# Altium PCB TimerSwitch.PcbDoc
Units mil, origin at the board's own origin, x right, y up, seen from the top; angles counter-clockwise.
Board outline 2992.13 x 2992.13 mil, 2 copper layers (Top Layer, Bottom Layer), stack 76.378 mil thick; 33 components, 43 nets, 166 pads, 53 vias.
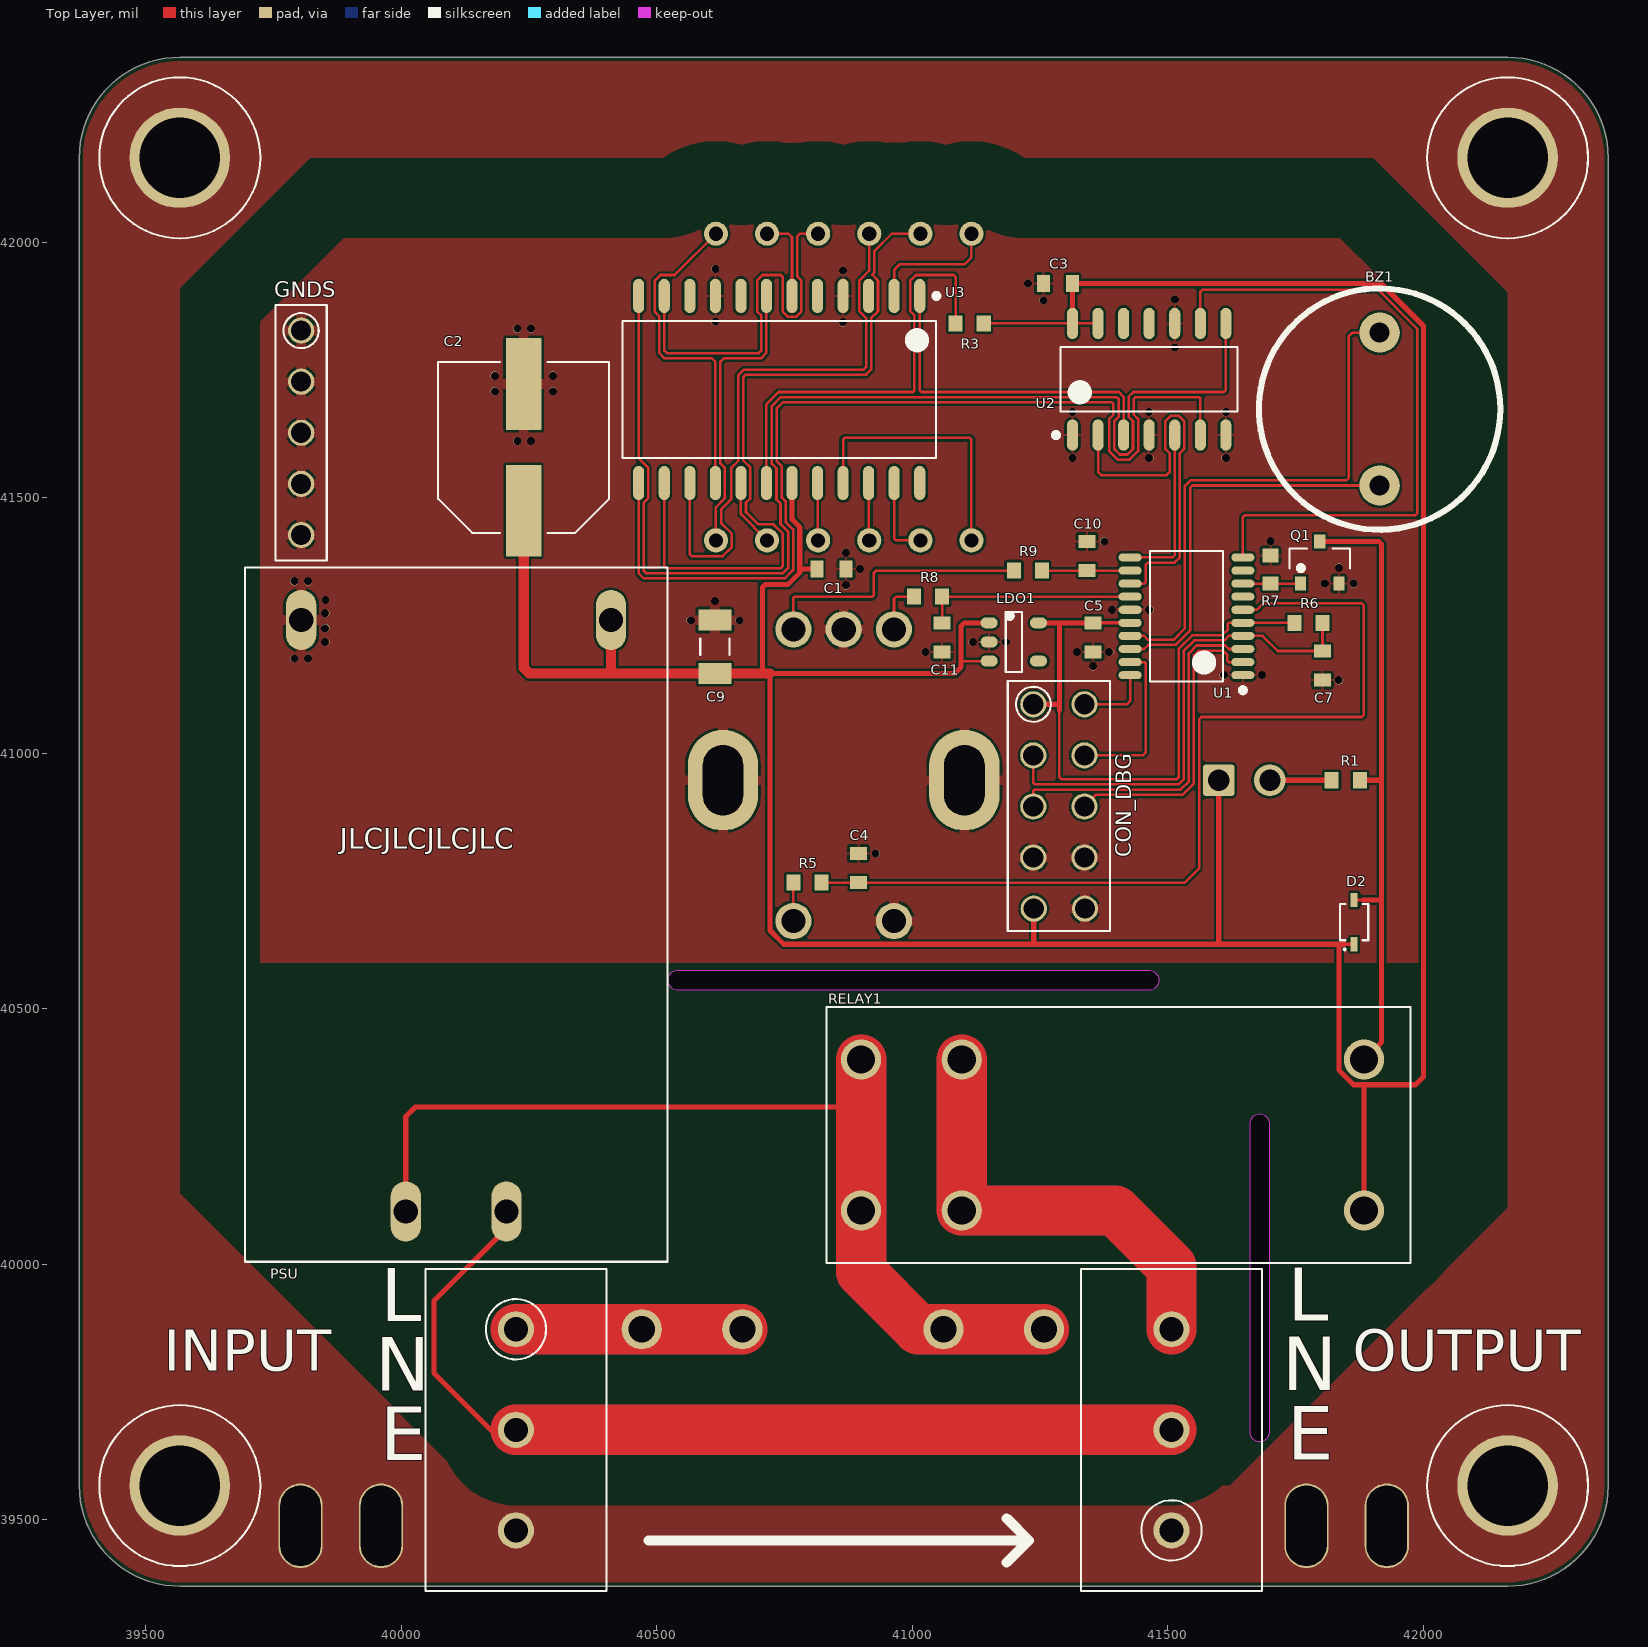
[diagram p0: Top Layer view]
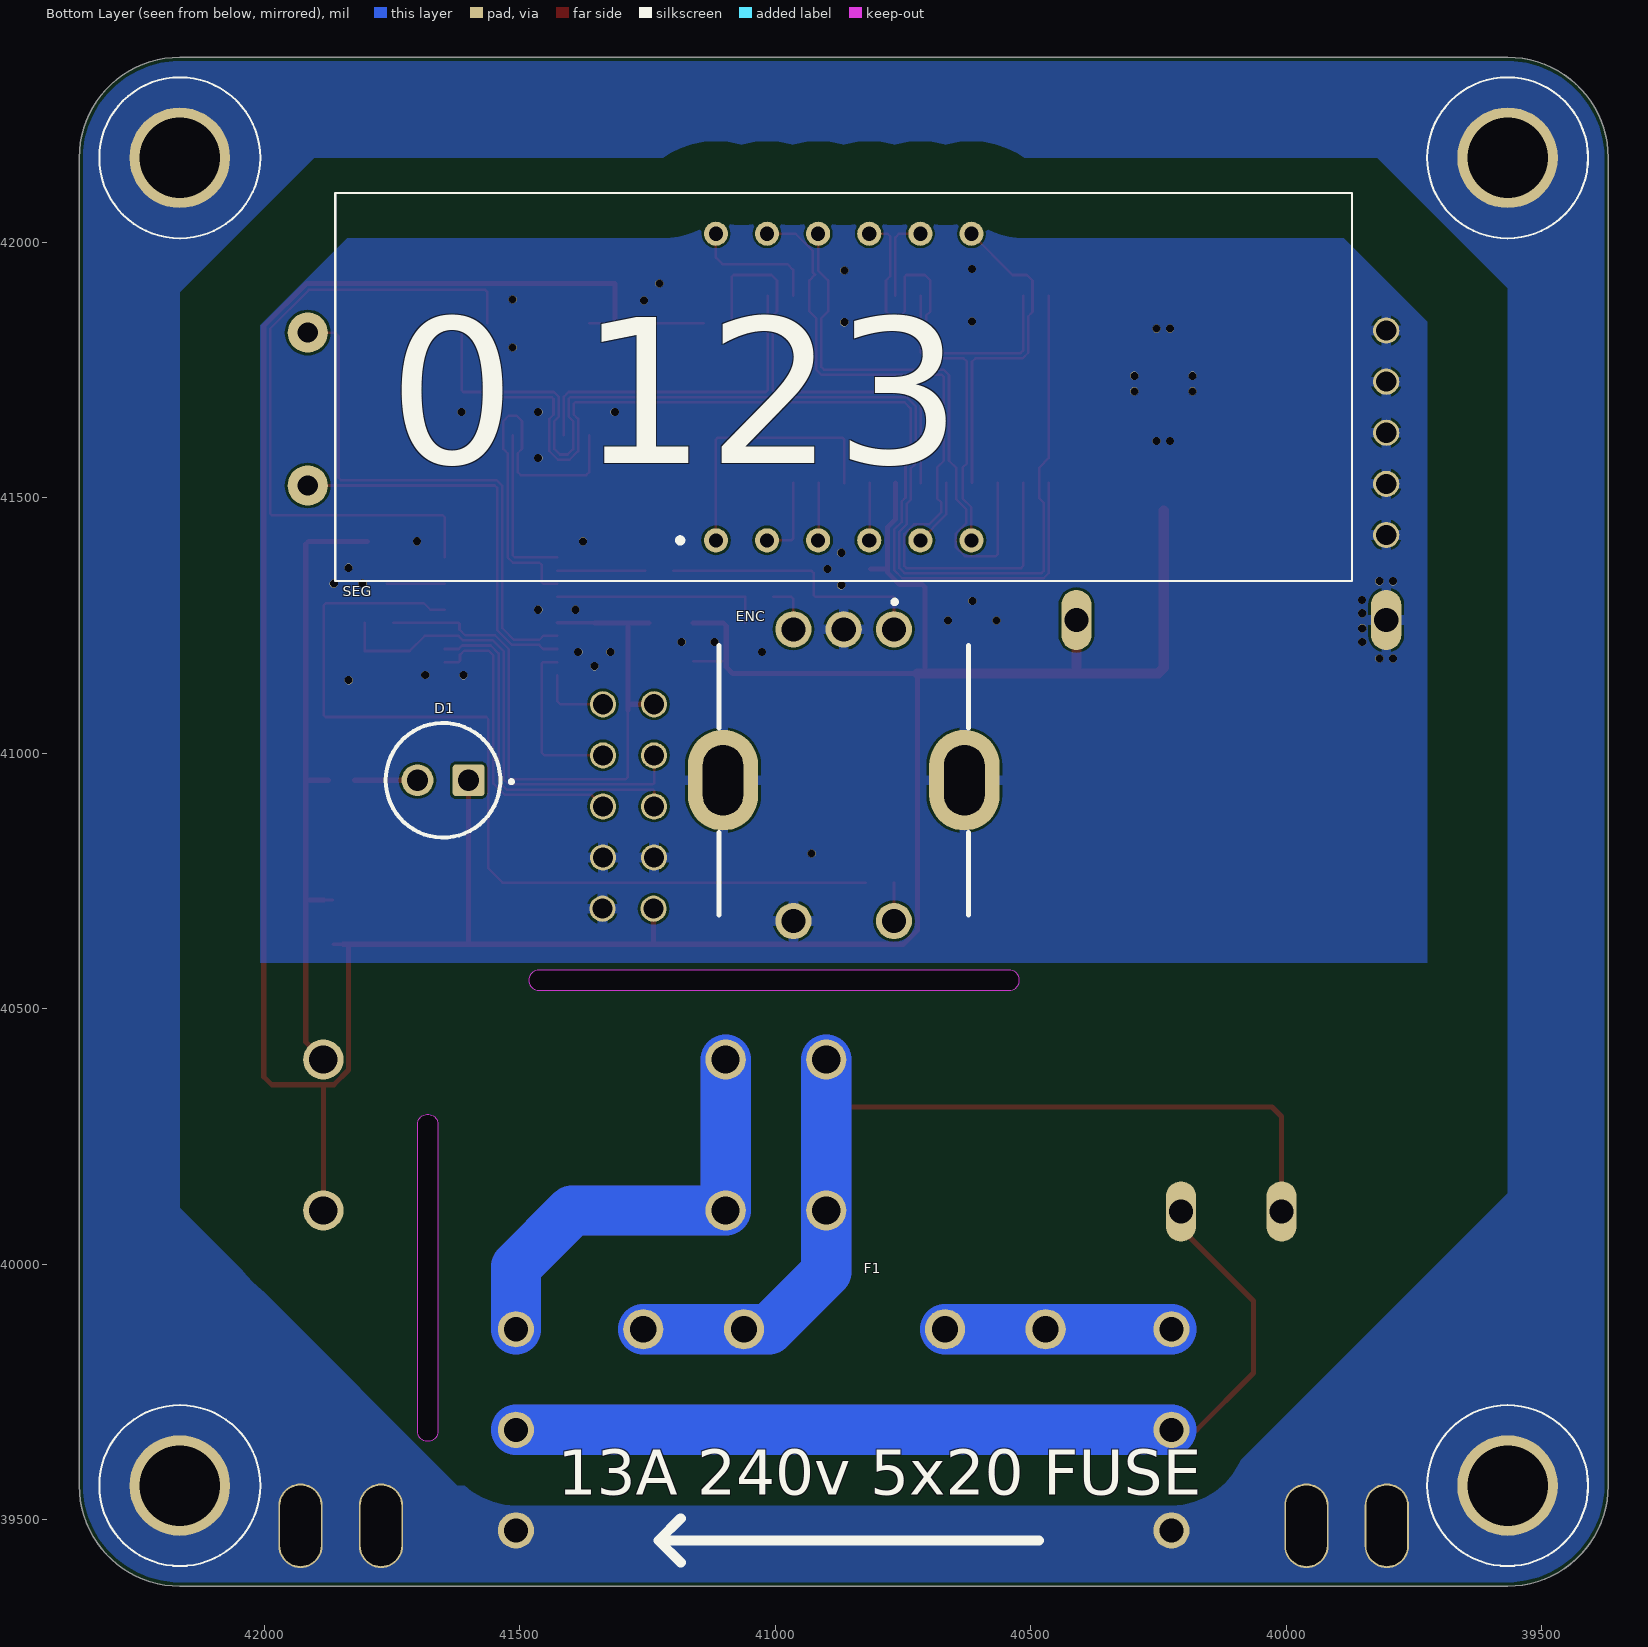
[diagram p1: Bottom Layer view, seen from below]

## Layer stack, top to bottom
Top Solder: solder mask 0.3937, Solder Resist, Dk 3.5
Top Layer: signal copper 2.7559
Dielectric 1: dielectric 70.8661, FR-4, Dk 4.8
Bottom Layer: signal copper 2.7559
Bottom Solder: solder mask 0.3937, Solder Resist, Dk 3.5

## Board outline
39370.08,39566.93 39370.08,42165.35 cw(c39566.93,42165.35) 39566.93,42362.2 42165.35,42362.2 cw(c42165.35,42165.35) 42362.2,42165.35 42362.2,39566.93 cw(c42165.35,39566.93) 42165.35,39370.08 39566.93,39370.08 cw(c39566.93,39566.93)
cut-out: 41660.33,39673.05 ccw(c41680.03,39673.05) 41699.73,39673.05 41699.73,40274 ccw(c41680.03,40274) 41660.33,40274
cut-out: 40542,40536.3 cw(c40542,40556) 40542,40575.7 41463,40575.7 cw(c41463,40556) 41482.7,40556 cw(c41463,40556) 41463,40536.3
cut-out: 40542,40536.3 cw(c40542,40556) 40542,40575.7 41463,40575.7 cw(c41463,40556) 41482.7,40556 cw(c41463,40556) 41463,40536.3

## Design rules (kind name [scope] priority, off if disabled: settings)
BoardOutlineClearance BoardOutlineClearance_ALL [Not InLayerClass('Overlays')] p1: gap=7.87 except(0: Arc-CutoutEdge Track-CutoutEdge SMDPad-CutoutEdge THPad-CutoutEdge Via-CutoutEdge Fill-CutoutEdge Poly-CutoutEdge Region-CutoutEdge Text-CutoutEdge)
Clearance Clearance_GND_MAINS [InNet('GND') vs InNetClass('MAINS')] p1: gap=78.74
Clearance Clearance_MAINS_EARTH [InNetClass('EARTH') Or InNetClass('MAINS') vs Not (InNetClass('EARTH') Or InNetClass('MAINS') Or IsBoardCutoutRegion)] p2: gap=157.48
Clearance Clearance_MAINS_MAINS [InNetClass('MAINS') vs InNetClass('MAINS')] p3: gap=98.42
Clearance Clearance_MAINS_EARTH2 [InNetClass('MAINS') vs InNetClass('EARTH')] p4: gap=98.43
Clearance [All] p5: gap=5
HoleSize [All] p1: absolutevalues=TRUE maxlimit=157.48 minlimit=11.81 maxpercent=80.000 minpercent=20.000
HoleToHoleClearance [All] p1: gap=7.87 allowstackedmicrovias=FALSE
MinimumAnnularRing MinimumAnnularRing_GND [InNet('GND')] p1: minimumring=0
MinimumAnnularRing [All] p2: minimumring=3
MinimumSolderMaskSliver [All] p1: minsoldermaskwidth=1.8
PolygonConnect PolygonConnect_MAINS [All vs InNetClass('EARTH')] p1: connectstyle=Direct reliefconductorwidth=10 reliefentries=4 polygonreliefangle="90 Angle" airgapwidth=10
PolygonConnect PolygonConnect_BIGGER [All vs PadViaLibraryTemplate='MOUNT_HOLE'] p2: connectstyle=Direct reliefconductorwidth=10 reliefentries=4 polygonreliefangle="90 Angle" airgapwidth=10
PolygonConnect PolygonConnect_THRUHOLE [InNet('GND') vs IsPad and ((AsMM(PadXSize_AllLayers)>=1) and (AsMM(PadYSize_AllLayers)>=1))] p3: connectstyle=Relief reliefconductorwidth=20 reliefentries=4 polygonreliefangle="90 Angle" airgapwidth=5
PolygonConnect PolygonConnect_STITCH [All vs PadViaLibraryTemplate='GND_STITCH'] p4: connectstyle=Direct reliefconductorwidth=10 reliefentries=4 polygonreliefangle="90 Angle" airgapwidth=10
PolygonConnect [All] p5: connectstyle=Relief reliefconductorwidth=5 reliefentries=4 polygonreliefangle="90 Angle" airgapwidth=5
RoutingVias RoutingVias_GND [InNet('GND')] p1: holewidth=28 width=50 viastyle="Through Hole" minholewidth=28 minwidth=50 maxholewidth=28 maxwidth=50 useviatemplates=TRUE viatemplateguid#1={2038F321-9B4C-4A12-BEFA-671C173DC19C} viatemplatename#1=GND_STITCH
RoutingVias [All] p2: holewidth=28 width=50 viastyle="Through Hole" minholewidth=28 minwidth=50 maxholewidth=28 maxwidth=50 useviatemplates=TRUE viatemplateguid#1={706E1524-345E-481C-947A-4B07CDBEF7FE} viatemplatename#1=ROUTER
SMDEntry [All] p1: side=TRUE corner=FALSE anyangle=FALSE
SMDNeckDown [All] p1: percent=50.000
SMDToCorner [All] p1: distance=50000
SilkToSilkClearance [All] p1: silktosilkclearance=0
SilkToSolderMaskClearance [IsPad] p1: minsilkscreentomaskgap=0 clearancetoexposedcopper=TRUE
SolderMaskExpansion [All] p1: expansion=4
Width [All] p1: maxlimit=100 minlimit=5 preferedwidth=5 minimp=50.000000 maximp=50.000000 favimp=50.000000
25 further rules are at their usual default settings.

## Classes and differential pairs
net class MAINS: LINE LINE_HOT LINE_IN NEUTRAL
net class EARTH: EARTH

## Components (designator, comment, footprint, x,y, rotation, side; value= is the part's Value field where it differs from the comment)
BZ1 "BUZZER" PIEZO_BUZZER 41915,41673.66 r270 top
C1 "100nF" CAPC1608X07L 40842.14,41360.64 r180 top
C2 "100uF" CAPAE9585X105L 40239.83,41598.67 r90 top
C3 "100nF" CAPC1608X07L 41285.46,41919.33 r0 top
C4 "100nF" CAPC1608X07L 40894.86,40775.54 r270 top
C5 "1uF" CAPC1608X07L 41354,41226.74 r270 top
C7 "1uF" CAPC1608X07L 41803.15,41171.62 r90 top
C9 "4.7uF" CAPC3216X07L 40614,41208.45 r90 top
C10 "100nF" CAPC1608X07L 41342,41386.19 r90 top
C11 "100nF" CAPC1608X07L 41058.76,41226.73 r90 top
CON_DBG "CON10" CON10 41287.19,40895.89 r270 top
D1 "LED" LED 41650.19,40947.28 r90 bottom
D2 "DSF05S30U" SODFL250X100-2L 41865.16,40669.57 r90 top
ENC "ROTARY_ENCODER" PEC12R-4XXXF-SXXXX_1 40866.13,40947.28 r0 bottom
F1 "520_102701" "5x20 FUSE" 40864.63,39872.85 r180 bottom
GNDS "CON5" CON5 39804.45,41627.25 r270 top
INPUT "TERMINAL" TERMINAL_BLOCK 40224.63,39676 r270 top
LDO1 "NCV8560SN350T1G" TSOP95P280X110-6L 41199,41217.88 r0 top
OUTPUT "TERMINAL" TERMINAL_BLOCK 41507.63,39676 r90 top
PSU "HLK-PM01" HLK-PM01 40107.6,40103.4 r90 top
Q1 "SSM3K36MFV" SOT95P230X110-3L 41797.83,41373.39 r90 top
R1 "1.2k" RESC1608X05L 41848.75,40947.28 r180 top
R3 "28k" RESC1608X05L 41112.67,41841.25 r0 top
R5 "2K" RESC1608X05L 40795.27,40747 r180 top
R6 "10k" RESC1608X05L 41775.59,41255.28 r180 top
R7 "10k" RESC1608X05L 41701.21,41359.61 r270 top
R8 "2K" RESC1608X05L 41031.2,41306.46 r0 top
R9 "2K" RESC1608X05L 41226.77,41357.64 r0 top
RELAY1 "HF118F" G5RL-1-E-HR 41884.53,40400.62 r180 top
SEG "5641AH" 5641AH 40866.14,41716.74 r180 bottom
U1 "STM32F030F4P6" TSOP65P630X120-20L 41537,41268.08 r180 top
U2 "74HC125" SOIC127P600X175-14L 41464,41732 r90 top
U3 "MAX7219" SOIC127P1030X265-24L 40740,41712 r270 top

## Footprints (in the part's own frame and the unit in brackets; to place one, negate y for a bottom-side part, rotate by r counter-clockwise, add the part's x,y. Pads: shape width x height; smd on the part's side, far side on the other; paste and mask are expansions set on the pad)
"5x20 FUSE" [mm] "5x20 FUSE, 5A, 240v, speed F"
  round 2 hole 1.3: 1(5,0) 1(10,0) 2(-10,0) 2(-5,0)
  body extent -10.3,-3.87 10.3,3.87, height 11.42
5641AH [mm]
  round 1.2 hole 0.7: 1(-6.35,-7.62) 2(-3.81,-7.62) 3(-1.27,-7.62) 4(1.27,-7.62) 5(3.81,-7.62) 6(6.35,-7.62) 7(6.35,7.62) 8(3.81,7.62) 9(1.27,7.62) 10(-1.27,7.62) 11(-3.81,7.62) 12(-6.35,7.62)
  silkscreen extent -25.27,-9.65 25.27,9.65, body extent -25.15,-9.5 25.15,9.5, height 8.05
CAPAE9585X105L [mm] "Aluminum Electrolytic Capacitor, Body 8.50x8.45x10.50mm, IPC High Density"
  rrect1% 4.55x1.75 smd: 1(-3.15,0) 2(3.15,0)
  silkscreen extent -4.25,-4.25 4.25,4.25, body extent -4.75,-4.25 4.75,4.25, height 10.5
CAPC1608X07L [mm] "Chip Capacitor, 2-Leads, Body 1.60x0.80mm, IPC High Density"
  rrect1% 0.65x0.85 smd: 1(-0.725,0) 2(0.725,0)
  body extent -0.85,-0.45 0.85,0.45, height 0.7
CAPC3216X07L [mm] "Chip Capacitor, 2-Leads, Body 3.20x1.60mm, IPC High Density"
  rrect1% 1.05x1.65 smd: 1(-1.325,0) 2(1.325,0)
  silkscreen extent -0.4,-0.72 0.4,0.72, body extent -1.65,-0.85 1.65,0.85, height 0.7
CON5 [mm] "2.54 3x2"
  round 1.3 hole 1: 1(-5.08,0) 2(-2.54,0) 3(0,0) 4(2.54,0) 5(5.08,0)
  silkscreen extent -6.35,-1.27 6.35,1.27
CON10 [mm] "2.54 3x2"
  round 1.3 hole 1: 1(-5.08,-1.27) 2(-2.54,-1.27) 3(0,-1.27) 4(2.54,-1.27) 5(5.08,-1.245) 6(5.08,1.295) 7(2.54,1.27) 8(0,1.27) 9(-2.54,1.27) 10(-5.08,1.27)
  silkscreen extent -6.25,-2.54 6.2,2.54
G5RL-1-E-HR [mm] "16A 240v relay 5v coil 62.5ohm"
  round 2 hole 1.4: 1(0,0) 2(0,7.5) 3(20,0) 3(20,7.5) 4(25,0) 4(25,7.5)
  silkscreen extent -2.31,-2.62 26.72,10.11, body extent -2.3,-2.6 26.7,10.1, height 15.7
HLK-PM01 [mm] "5V PSU"
  oval 3x1.5 hole 1.2: 1(0,2.5) 2(0,-2.5) 3(29.4,7.7) 4(29.4,-7.7)
  silkscreen extent -2.5,-10.5 32,10.5, body extent -2.3,-10.1 31.7,10.1, height 15
LED [mm] "5MM through hole LED"
  rrect20% 1.58x1.58 hole 1.05: 1(0,-1.27)
  round 1.58 hole 1.05: 2(0,1.27)
  silkscreen extent -2.85,-3.47 2.85,2.85, body extent -3,-2.5 3,3, height 8.9
PEC12R-4XXXF-SXXXX_1 [mm]
  round 1.8 hole 1.2: 1(-2.5,-7.5) 2(0,-7.5) 3(2.5,-7.5) 4(-2.5,7) 5(2.5,7)
  rrect100% 3.5x5 hole 2 slot 3.5 at 90 deg: 2(-6,0)
  oval 3.5x5 hole 2 slot 3.5 at 90 deg: 2(6,0)
  silkscreen extent -6.2,-8.95 6.2,6.7, body extent -6.92,-7.67 6.92,7.18, height 26.5
PIEZO_BUZZER [mm] "Piezo buzzer"
  round 2 hole 1: 1(3.8,0) 2(-3.8,0)
  silkscreen extent -6,-6 6,6, body extent -6,-6 6,6, height 9.5
RESC1608X05L [mm] "Chip Resistor, 2-Leads, Body 1.60x0.80mm, IPC High Density"
  rrect1% 0.7x0.8 smd: 1(-0.7,0) 2(0.7,0)
  body extent -0.85,-0.45 0.85,0.45, height 0.5
SODFL250X100-2L [mm] "SODFL, 2-Leads, Body 1.25x2.50mm, IPC High Density"
  rrect1% 0.7x0.35 smd: 1(1.1,0) 2(-1.1,0)
  silkscreen extent -1.4,-0.7 0.9,0.7, body extent -1.25,-0.67 1.25,0.67, height 1
SOIC127P600X175-14L [mm] "SOIC, 14-Leads, Body 8.65x3.90mm, Pitch 1.27mm, IPC High Density"
  oval 1.55x0.55 smd: 1(-2.775,3.81) 2(-2.775,2.54) 3(-2.775,1.27) 4(-2.775,0) 5(-2.775,-1.27) 6(-2.775,-2.54) 7(-2.775,-3.81) 8(2.775,-3.81) 9(2.775,-2.54) 10(2.775,-1.27) 11(2.775,0) 12(2.775,1.27) 13(2.775,2.54) 14(2.775,3.81)
  silkscreen extent -2.9,-4.4 1.6,4.76, body extent -3,-4.4 3,4.4, height 1.75
SOIC127P1030X265-24L [mm] "SOIC, 24-Leads, Body 15.40x7.50mm, Pitch 1.27mm, IPC High Density"
  oval 1.7x0.55 smd: 1(-4.65,6.985) 2(-4.65,5.715) 3(-4.65,4.445) 4(-4.65,3.175) 5(-4.65,1.905) 6(-4.65,0.635) 7(-4.65,-0.635) 8(-4.65,-1.905) 9(-4.65,-3.175) 10(-4.65,-4.445) 11(-4.65,-5.715) 12(-4.65,-6.985) 13(4.65,-6.985) 14(4.65,-5.715) 15(4.65,-4.445) 16(4.65,-3.175) 17(4.65,-1.905) 18(4.65,-0.635) 19(4.65,0.635) 20(4.65,1.905) 21(4.65,3.175) 22(4.65,4.445) 23(4.65,5.715) 24(4.65,6.985)
  silkscreen extent -4.77,-7.8 3.4,7.94, body extent -5.16,-7.8 5.16,7.8, height 2.65
SOT95P230X110-3L [mm] "SOT23, 3-Leads, Body 2.90x2.30mm, Pitch 0.95mm, IPC High Density"
  rrect1% 0.7x0.55 smd: 1(-1.05,0.95) 2(-1.05,-0.95) 3(1.05,0)
  silkscreen extent -0.4,-1.5 0.7,1.5, body extent -1.3,-1.5 1.3,1.5, height 1.1
TERMINAL_BLOCK [mm] "3 Way 5mm screw terminal block"
  round 1.8 hole 1.2: 1(-5,0) 2(0,0) 3(5,0)
  silkscreen extent -8,-4.5 8,4.5, body extent -7.65,-4 7.5,4, height 10
TSOP65P630X120-20L [mm] "TSOP, 20-Leads, Body 6.45x4.30mm, Pitch 0.65mm, IPC High Density"
  oval 1.15x0.4 smd: 1(-2.8,2.925) 2(-2.8,2.275) 3(-2.8,1.625) 4(-2.8,0.975) 5(-2.8,0.325) 6(-2.8,-0.325) 7(-2.8,-0.975) 8(-2.8,-1.625) 9(-2.8,-2.275) 10(-2.8,-2.925) 11(2.8,-2.925) 12(2.8,-2.275) 13(2.8,-1.625) 14(2.8,-0.975) 15(2.8,-0.325) 16(2.8,0.325) 17(2.8,0.975) 18(2.8,1.625) 19(2.8,2.275) 20(2.8,2.925)
  silkscreen extent -2.93,-3.25 1.83,3.8, body extent -3.15,-3.25 3.15,3.25, height 1.2
TSOP95P280X110-6L [mm] "TSOP, 6-Leads, Body 3.00x1.50mm, Pitch 0.95mm, IPC High Density"
  oval 0.85x0.55 smd: 1(-1.225,0.95) 2(-1.225,0) 3(-1.225,-0.95) 4(1.225,-0.95) 5(1.225,0.95)
  silkscreen extent -0.4,-1.5 0.4,1.5, body extent -1.38,-1.5 1.38,1.5, height 1.1

## Part data
C1 C3 C4 C5 C7: library part CAP_CERAMIC
C2: library part CAP_ELECTROLYTIC
C9 C10 C11: library part CAP_CERAMIC, "Ceramic capacitor"
CON_DBG: "Debug connector"
D1: "5mm through hole LED"
D2: "Schottky Diode 20v 500mA"
ENC: "Generic rotary encoder"
F1: "5x20 5A fuse speed F"
INPUT OUTPUT: "3 way terminal block"
LDO1: "3.5V 150mA LDO"
PSU: "5V PSU 0.6A"
Q1: "MOSFET N"
R1 R3 R5 R6 R7: library part RESISTOR
R8 R9: library part RESISTOR, "Resistor 1%"
RELAY1: "240V 10A Relay 5V"
SEG: "7+1 x 4 Segment display"
U1: "Microcontroller 4KB RAM 16KB Flash"
U2: "4 Channel level shifter"
U3: "7 Segment LED Driver"

## Free pads (board coordinates)
  round 196.85 hole 157.48 mask+0: 1(39566.93,39566.93) 1(39566.93,42165.35) 1(42165.35,42165.35) 1(42165.35,39566.93)
  oval 86.61x165.35 hole 78.74 slot 157.48 at 90 deg mask+0: 1(39803.17,39488.19) 1(39960.65,39488.19) 1(41771.65,39488.19) 1(41929.13,39488.19)

## Via types
v1: diameter 16.14, hole 15.75, Top Layer to Bottom Layer, tented both sides, 53 vias

## Nets (pads, with @x,y where several pads share a name; then routed paths per layer and width w, separated by ;. In a path a pad name is that pad's centre, name@x,y a point inside that pad or via, vN(x,y) a via of type N, cw(c..) or ccw(c..) an arc to the next point about the centre after c; other vN are vias at no path point)
BTN: C4.2 R5.1 U1.6 | length 1826.3
  Top Layer w5: R5.1 C4.2 41533.9,40747 41561.58,40774.68 41561.58,41066.58 41566,41071 41879.93,41071 41884,41075.07 41884,41289.12 41879.12,41294 41688,41294 41674.87,41280.87 U1.6
CLK: U2.6 U3.13 | length 1961.2
  Top Layer w5: U3.13 40465,41352.31 40474.75,41342.56 40751.53,41342.56 40767.26,41358.29 40767.26,41437.92 40752.5,41452.68 40752.5,41492.87 40745.14,41500.24 40745.14,41561.49 40735,41571.63 40735,41674.86 40747.14,41687 41391.06,41687 41394,41684.06 41394,41662.49 41385.67,41654.17 41385.67,41591.33 41402.27,41574.74 41425.73,41574.74 41442.33,41591.33 41442.33,41654.17 41434,41662.49 41434,41693.82 41437.18,41697 41561.44,41697 41564,41694.44 U2.6
CLK_L: U1.11 U2.5 | length 324.2
  Top Layer w5: U1.11 41509.66,41383.24 41514,41387.57 U2.5
COIL_LOW: D2.1 Q1.3 R1.1 RELAY1.1 | length 1244.4
  Top Layer w6: D2.1 41883,40712.87
  Top Layer w10: Q1.3 41913.27,41414.73 41918.9,41409.1 41918.9,40947.28 ; R1.1@41874.34,40947.28 R1.1 41918.9,40947.28 ; 41883,40712.87 41918.9,40712.87 ; RELAY1.1 41918.9,40434.99 41918.9,40712.87 ; 41918.9,40712.87 41918.9,40947.28
DEBUG1: CON_DBG.8 U1.2 | length 599.5
  Top Layer w5: CON_DBG.8 41360.29,40918.98 41529.78,40918.98 41551.58,40940.79 41551.58,41191.58 41561,41201 41608.68,41201 41617,41192.68 41617,41181 41619.49,41178.51 U1.2
DEBUG2: CON_DBG.3 U1.3 | length 708.5
  Top Layer w5: CON_DBG.3 41237.19,40926.92 41239.26,40928.98 41525.64,40928.98 41541.58,40944.93 41541.58,41195.73 41556.86,41211 41612.82,41211 41619.72,41204.1 U1.3
DIN: U2.3 U3.1 | length 663.8
  Top Layer w5: U3.1 41015,41710.39 41018.39,41707 41404.58,41707 41414,41697.58 U2.3
DIN_L: U1.13 U2.2 | length 774.4
  Top Layer w5: U2.2 41364,41550.42 41370.13,41544.29 41498.11,41544.29 41504,41550.18 41504,41587.15 41495.67,41595.47 41495.67,41650.02 41506.41,41660.76 41521.59,41660.76 41532.33,41650.02 41532.33,41595.47 41524,41587.15 41524,41383.43 41513.81,41373.24 41461.91,41373.24 41456.9,41368.23 41456.9,41334.59 41454.36,41332.05 U1.13
EARTH: INPUT.3 OUTPUT.1 pad.1
ENABLE: Q1.1 R7.2 U1.8 | length 113.2
  Top Layer w5: U1.8 R7.2 Q1.1
GND: C1.1 C2.2 C3.1 C4.1 C5.2 C7.1 C9.2 C10.2 C11.1 CON_DBG.4 CON_DBG.6 CON_DBG.7 ENC.2 ENC.5 GNDS.1 GNDS.2 GNDS.3 GNDS.4 GNDS.5 LDO1.2 PSU.3 Q1.2 R7.1 U1.1 U1.15 U2.1 U2.4 U2.7 U2.10 U3.4 U3.9
  other v1: 40928.82,40804.09 41834.83,41143.08 41610,41152.92 41685,41153 41354,41170.45 39791,41185.45 39818,41185.45 41026,41198.18 41322.94,41198.2 41385.78,41198.2 39851.35,41218 41118.79,41217.83 41183.25,41217.88 39851.35,41244.51 40567,41260 40661.84,41260 39851.35,41274.09 41391,41280.87 41463.97,41280.87 40614.36,41297.97 39852,41300 40870.68,41329 41807.55,41332.05 41864,41332 39791,41336.8 39818,41336.8 40898,41360.64 41835.23,41363 40870.68,41392.48 41376.2,41414.73 41701.21,41415 41314,41577.67 41464,41577.67 41614,41577.67 40227.42,41611.35 40254,41611.35 41314,41668 41464,41668 41614,41668 40183.42,41708.35 40297.42,41708.35 40183.42,41738.77 40297.42,41738.77 41514,41794 40227.42,41831 40254,41831 40865,41843.75 40615,41845 41256.91,41886 41514,41888 41227,41919.33 40865,41945 40615,41948
LINE: F1.2 PSU.1 RELAY1.4 | length 2927.9
  Top Layer w10: PSU.1 40009.18,40289.18 40028,40308 40900.27,40308 RELAY1.4@40900.27,40105.34
  Top Layer w98.43: RELAY1.4@40900.27,40105.01 40900.27,39984.73 41012.15,39872.85 F1.2@41258.33,39872.85 ; RELAY1.4@40900.27,40400.62 40900.28,40105.34 RELAY1.4@40900.28,40105
  Bottom Layer w98.43: RELAY1.4@40900.27,40105.34 40900.27,39984.73 41012.15,39872.85 F1.2@41258.33,39872.85 ; RELAY1.4@40900.27,40400.62 RELAY1.4@40900.28,40105.34
LINE_HOT: OUTPUT.3 RELAY1.3 | length 1747.7
  Top Layer w98.43: RELAY1.3@41097.12,40400.62 41097.12,40105.34 41397.66,40105.34 41507.63,39995.37 OUTPUT.3
  Bottom Layer w98.43: RELAY1.3@41097.12,40400.62 41097.12,40105.34 41397.66,40105.34 41507.63,39995.37 OUTPUT.3
LINE_IN: F1.1 INPUT.1 | length 886.3
  Top Layer w98.43: INPUT.1 40470.93,39872.85 F1.1@40667.78,39872.85
  Bottom Layer w98.43: INPUT.1 40470.93,39872.85 F1.1@40667.78,39872.85
LOAD: U2.8 U3.12 | length 2434.3
  Top Layer w5: U3.12 40465,41577.48 40483.33,41559.16 40483.33,41498.7 40475,41490.37 40475,41356.46 40478.9,41352.56 40747.39,41352.56 40757.26,41362.44 40757.26,41433.77 40742.5,41448.54 40742.5,41488.73 40734.62,41496.61 40734.62,41557.87 40725,41567.48 40725,41679 40743,41697 41400.44,41697 41404,41693.44 41404,41658.35 41395.67,41650.02 41395.67,41595.47 41406.41,41584.74 41421.59,41584.74 41432.33,41595.47 41432.33,41650.02 41424,41658.35 41424,41697.96 41433.04,41707 41610.42,41707 41614,41710.58 U2.8
LOAD_L: U1.10 U2.9 | length 1303.6
  Top Layer w5: U2.9 41564,41902.7 41568.13,41906.83 41912.49,41906.83 41988.5,41830.82 41988.5,41469.5 41985,41466 41651.24,41466 41647.24,41462 U1.10
NetBZ1_1: BZ1.1 U1.18 | length 783.9
  Top Layer w5: U1.18 41454.32,41204.1 41462.3,41212.07 41515.5,41212.07 41544,41240.57 41544,41519 41549.06,41524.06 BZ1.1
NetBZ1_2: BZ1.2 U1.17 | length 1065.8
  Top Layer w5: U1.17 41454.31,41229.69 41461.93,41222.07 41511.36,41222.07 41534,41244.71 41534,41523.14 41544.91,41534.06 41849.63,41534.06 41854.85,41539.27 41854.85,41816.25 41861.87,41823.27 BZ1.2
NetD1_2: D1.2 R1.2 | length 123
  Top Layer w10: D1.2 R1.2@41823.16,40947.28
NetENC_1: ENC.1 R9.1 | length 540.9
  Top Layer w5: ENC.1 40767.71,41304.13 40770.05,41306.46 40922.06,41306.46 40925.06,41309.46 40925.06,41353.23 40929.47,41357.64 R9.1
NetENC_3: ENC.3 R8.1 | length 100.4
  Top Layer w5: ENC.3 40964.56,41302.02 40969,41306.46 R8.1
NetENC_4: ENC.4 R5.2 | length 75.3
  Top Layer w5: ENC.4 R5.2
NetR3_1: R3.1 U3.18 | length 859.1
  Top Layer w5: U3.18 40715,41683.14 40738.86,41707 41001.6,41707 41004.58,41709.99 41004.58,41856.93 40996.67,41864.84 40996.67,41925.3 41007.41,41936.04 41081.56,41936.04 41085.11,41932.48 R3.1
NetSEG_1: SEG.1 U3.21 | length 536.1
  Top Layer w5: U3.21 40865,41614.02 40868.11,41617.13 41113.05,41617.13 41116.14,41614.03 SEG.1
NetSEG_2: SEG.2 U3.23 | length 161.5
  Top Layer w5: U3.23 40965,41419.92 40968.18,41416.74 SEG.2
NetSEG_3: SEG.3 U3.22 | length 112.7
  Top Layer w5: U3.22 40915,41417.88 SEG.3
NetSEG_4: SEG.4 U3.20 | length 112.7
  Top Layer w5: U3.20 40815,41417.88 SEG.4
NetSEG_5: SEG.5 U3.17 | length 133.4
  Top Layer w5: U3.17 40665,41467.88 SEG.5
NetSEG_6: SEG.6 U3.7 | length 568.5
  Top Layer w5: SEG.6 40616.14,41481.52 40633.33,41498.7 40633.33,41559.16 40625,41567.48 40625,41766.31 40631.69,41773 40703.89,41773 40715,41784.11 U3.7
NetSEG_7: SEG.7 U3.16 | length 656.9
  Top Layer w5: U3.16 40615,41766.27 40608.27,41773 40515.87,41773 40505,41783.87 40505,41855.26 40496.67,41863.58 40496.67,41925.3 40507.41,41936.04 40535.44,41936.04 SEG.7
NetSEG_8: SEG.8 U3.6 | length 166.4
  Top Layer w5: SEG.8 40758.03,42016.74 40765,42009.77 U3.6
NetSEG_9: SEG.9 U3.11 | length 804.5
  Top Layer w5: U3.11 40515,41788.01 40520.01,41783 40699.75,41783 40705,41788.25 40705,41856.52 40696.67,41864.84 40696.67,41925.3 40707.41,41936.04 40743.41,41936.04 40746.67,41932.77 40746.67,41864.84 40757.41,41854.11 40772.59,41854.11 40783.33,41864.84 40783.33,41925.3 40775,41933.63 40775,42011.53 40780.21,42016.74 SEG.9
NetSEG_10: SEG.10 U3.15 | length 1120.9
  Top Layer w5: U3.15 40565,41389.3 40568.68,41385.62 40629.03,41385.62 40647.26,41403.85 40647.26,41429.63 40626.14,41450.75 40626.14,41477.37 40645.67,41496.9 40645.67,41558.15 40660,41572.48 40660,41740.14 40670.84,41750.98 40904.98,41750.98 40910,41756 40910,41851.52 40896.67,41864.84 40896.67,41925.3 40916.14,41944.77 SEG.10
NetSEG_11: SEG.11 U3.14 | length 1427.7
  Top Layer w5: U3.14 40515,41366.69 40519.13,41362.56 40743.24,41362.56 40747.26,41366.58 40747.26,41429.63 40729.03,41447.86 40699.16,41447.86 40675,41472.02 40675,41490.37 40683.33,41498.7 40683.33,41559.16 40670,41572.48 40670,41736 40674.98,41740.98 40910.13,41740.98 40920,41750.86 40920,41851.52 40933.33,41864.84 40933.33,41925.3 40922.07,41936.56 40926.29,41940.77 40926.29,41982.87 40960.15,42016.74 SEG.11
NetSEG_12: SEG.12 U3.2 | length 258.7
  Top Layer w5: U3.2 40965,41946 40976.35,41957.35 41103.35,41957.35 41116.14,41970.14 SEG.12
NEUTRAL: INPUT.2 OUTPUT.2 PSU.2 | length 3147.8
  Top Layer w10: PSU.2 40206.03,40070.1 40064,39928.07 40064,39787 40175,39676 INPUT.2
  Top Layer w98.43: INPUT.2 OUTPUT.2
  Bottom Layer w98.43: INPUT.2 OUTPUT.2
RESET: C7.2 CON_DBG.2 R6.1 U1.4 | length 955.9
  Top Layer w5: CON_DBG.2 41237.19,40941.84 41240.05,40938.98 41521.5,40938.98 41531.58,40949.07 41531.58,41199.87 41552.72,41221 41611,41221 41619.69,41229.69 U1.4 41686.05,41229.69 41715.57,41200.16 C7.2 R6.1
ROTARYA: C10.1 R9.2 U1.12 | length 172.4
  Top Layer w5: R9.2 C10.1 U1.12
ROTARYB: C11.2 R8.2 U1.14 | length 419.2
  Top Layer w5: C11.2 R8.2 U1.14
SWCLK: CON_DBG.10 U1.20 | length 142.9
  Top Layer w5: CON_DBG.10 41420.41,41095.89 41426.76,41102.25 U1.20
SWDIO: CON_DBG.9 U1.19 | length 328.2
  Top Layer w5: CON_DBG.9 41451.76,40995.89 41457.16,41001.29 41457.16,41175.74 41454.39,41178.51 U1.19
VCC3V5: C5.1 CON_DBG.1 LDO1.5 R6.2 U1.5 U1.16 | length 1274.7
  Top Layer w5: 41288.38,41084 41288.38,40953.29 41292.69,40948.98 41517.35,40948.98 41521.58,40953.22 41521.58,41204.01 41548.57,41231 41606.86,41231 41618,41242.14 41618,41253.68 41619.6,41255.28 U1.5 R6.2
  Top Layer w7: C5.1 U1.16
  Top Layer w10: CON_DBG.1 41288.38,41095.89 ; LDO1.5 C5.1 ; 41288.38,41084 41288.38,41095.89 ; 41288.38,41255.28 41288.38,41095.89
VCC5: C1.2 C2.1 C3.2 C9.1 CON_DBG.5 D1.1 D2.2 LDO1.1 LDO1.3 PSU.4 R3.2 RELAY1.2 U2.13 U2.14 U3.19 | length 7176.1
  Top Layer w5: 41096,41180.48 LDO1.3@41160.77,41180.48 ; R3.2 U2.14 U2.13
  Top Layer w6: 41846,40626.26 D2.2
  Top Layer w10: 40707.08,41156.28 40707.08,41325.08 40712.06,41330.06 40756.71,41330.06 40780.13,41353.48 40780.13,41360.64 ; U3.19 40765,41457.86 40780.13,41442.73 40780.13,41360.64 ; C1.2 40780.13,41360.64 ; LDO1.1@41160.77,41255.28 41102.04,41255.28 41096,41249.25 41096,41168.63 41083.65,41156.28 40722,41156.28 40722,40653.15 40748.89,40626.26 41238.19,40626.26 ; CON_DBG.5 41238.19,40626.26 ; U2.14 C3.2 41917.67,41919.33 42001,41836 42001,40367 41985.25,40351.25 41864.08,40351.25 41835.16,40380.17 41835.16,40626.26 ; D1.1 41600.19,40626.26 ; 41846,40626.26 41835.16,40626.26 ; RELAY1.2 41884.53,40351.25 ; 41238.19,40626.26 41600.19,40626.26 ; 41600.19,40626.26 41835.16,40626.26
  Top Layer w20: C2.1 40239.83,41167.17 40250.72,41156.28 40410.75,41156.28 ; PSU.4 40410.75,41156.28 ; 40722,41156.28 40707.08,41156.28 C9.1 40410.75,41156.28
pads on no net: LDO1.4 U1.7 U1.9 U2.11 U2.12 U3.3 U3.5 U3.8 U3.10 U3.24

## Polygon pours and split planes (outlines as drawn)
EARTH on Top Layer "TOP_EARTH" (solid, remove dead copper, pour order 14): 39370.08,42362.2 42362.2,42362.2 42362.2,39370.08 39370.08,39370.08 39370.08,41910 39566.93,41910 39566.93,40139.07 40139.07,39566.93 41621.93,39566.93 42165.35,40110.35 42165.35,41902.65 41902.65,42165.35 39822.28,42165.35 39566.93,41910 39370.08,41910
GND on Top Layer "TOP_GND" (solid, remove dead copper, pour order 16): 39370.16,42362.21 42362.22,42362.2 42362.22,40590.55 39370.15,40590.55
EARTH on Bottom Layer "BOTTOM_EARTH" (solid, remove dead copper, pour order 10): 39370.08,42362.2 42362.2,42362.2 42362.2,39370.08 39370.08,39370.08 39370.08,41910 39566.93,41910 39566.93,40139.07 40139.07,39566.93 41621.93,39566.93 42165.35,40110.35 42165.35,41902.65 41902.65,42165.35 39822.28,42165.35 39566.93,41910 39370.08,41910
GND on Bottom Layer "BOTTOM_GND" (solid, remove dead copper, pour order 18): 39375.16,42362.21 42362.22,42362.2 42362.18,41848.18 42362.2,40590.55 39375.16,40590.55

## Silkscreen, mask and mechanical layers (free items; w line width, h text height)
Top Overlay:
  circle w4: c39566.93,39566.93 r157.48
  circle w4: c42165.35,39566.93 r157.48
  circle w4: c42165.35,42165.35 r157.48
  circle w4: c39566.93,42165.35 r157.48
  lines w19.68: 40484.25,39459.46 41228.35,39459.46 ; 41185.04,39416.16 41228.35,39459.46 ; 41185.04,39502.77 41228.35,39459.46
  text "JLCJLCJLCJLC" at 39880,40813 h40
  text "L" at 41735,39856 h180
  text "L" at 39960,39855 h180
  text "N" at 41724.17,39719.5 h180
  text "N" at 39949.17,39718.5 h180
  text "E" at 41733.83,39583 h180
  text "E" at 39958.83,39582 h180
  text "* Layer Mechanical-4 (GM4) is board cutout" at 39696,38609 h120
Bottom Overlay:
  circle w4: c39566.93,42165.35 r157.48
  circle w4: c42165.35,42165.35 r157.48
  circle w4: c42165.35,39566.93 r157.48
  circle w4: c39566.93,39566.93 r157.48
  lines w19.68: 40484.25,39459.46 41228.35,39459.46 ; 41185.04,39416.16 41228.35,39459.46 ; 41185.04,39502.77 41228.35,39459.46
  text "13A 240v 5x20 FUSE" at 41426,39520 h150
Top Solder:
  lines w98.43: 40224.63,39872.85 40485.3,39872.85 40667.78,39872.85 ; 40230,39676 41507.63,39676 ; 40900.27,40105.01 40900.27,39984.73 41012.15,39872.85 41061.48,39872.85 41258.33,39872.85 ; 40900.27,40400.62 40900.28,40105.34 ; 41097.12,40400.62 41097.12,40105.34 41397.66,40105.34 41507.63,39995.37 41507.63,39872.85
Bottom Solder:
  lines w98.43: 40224.63,39676 41507.63,39676 ; 40224.63,39872.85 40667.78,39872.85 ; 40900.27,40105.34 40900.27,39984.73 41012.15,39872.85 41061.48,39872.85 41258.33,39872.85 ; 40900.27,40400.62 40900.28,40105.34 ; 41097.12,40400.62 41097.12,40105.34 41397.66,40105.34 41507.63,39995.37 41507.63,39872.85
Mechanical 2:
  lines w4: 39370.08,42165.35 cw(c39566.93,42165.35) 39566.93,42362.2 42165.35,42362.2 cw(c42165.35,42165.35) 42362.2,42165.35 ; 39370.08,42165.35 39370.08,42165.35 ; 39370.08,42165.35 39370.08,39566.93 ccw(c39566.93,39566.93) 39566.93,39370.08 42165.35,39370.08 ccw(c42165.35,39566.93) 42362.2,39566.93 42362.2,42165.35 ; 42362.2,42165.35 42362.2,42165.35
Mechanical 4:
  lines w39.37: 40542,40556 41463,40556 ; 41680.03,39673.05 41680.03,40274

## Dimensions
40816.14,42016.74 to 39566.93,42165.35 on Mechanical 3
40916.14,42016.74 to 42165.35,42165.35 on Mechanical 3
41507.63,39479.15 to 42165.35,39566.93 on Mechanical 3
40224.63,39479.15 to 39566.93,39566.93 on Mechanical 3
42165.35,42165.35 to 41102.35,40947.28 on Mechanical 3
39566.93,42165.35 to 40629.91,40947.28 on Mechanical 3
39566.93,39566.93 to 39370.08,39370.08 on Mechanical 3
39566.93,39566.93 to 39370.08,39566.93 on Mechanical 3
39566.93,39370.08 to 39566.93,42362.2 on Mechanical 3
39370.08,42165.35 to 42362.2,42165.35 on Mechanical 3

## Text inside footprints (layer, text, board x,y; h text height)
SEG: Bottom Overlay "0 123" at 41756.14,41376.74 h1000